# EAGLE board drill-rev-1_panelized (EAGLE 6.5.0)
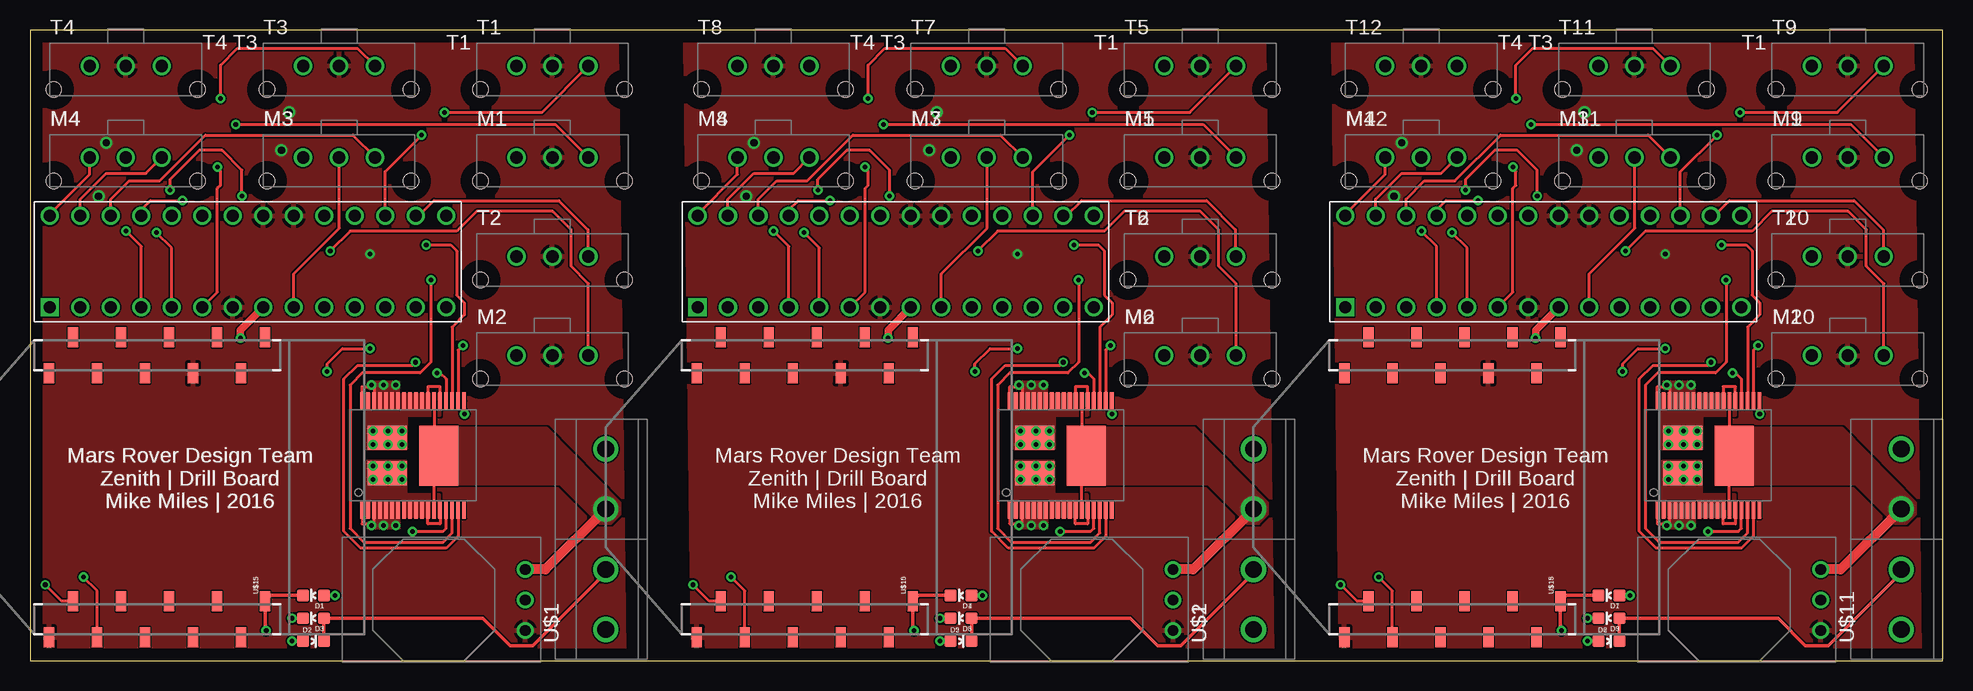
[diagram p0: board, top side]
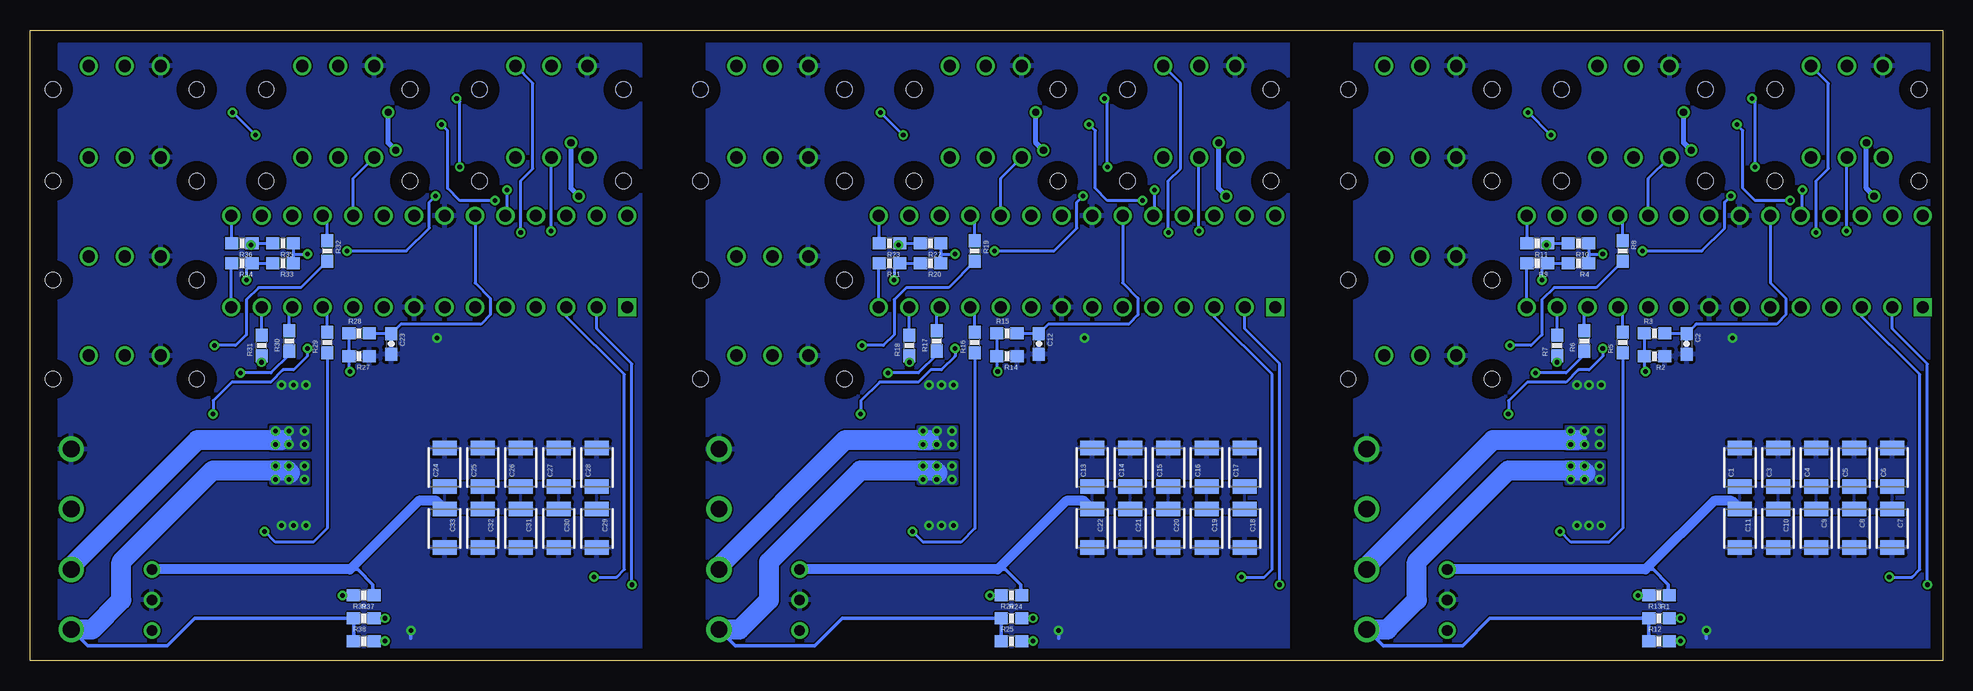
[diagram p1: board, bottom side, seen from below]

Size 159.38 x 52.58 mm. Coordinates in mm from the lower left corner, seen from the top.
Outline: 0,0 159.38,0 159.38,52.58 0,52.58 0,0
Copper layers (1*16): Top 0.035mm / dielectric 1.5mm / Bottom 0.035mm
Design rules "default *": minimum track width 6mil, minimum drill 10mil, track to track 5mil, track to pad 5mil, pad to pad 5mil, via to via 5mil, smd to smd 5mil, copper to edge 40mil, drill to drill 8mil, minimum pad ring 10mil, minimum via ring 8mil, stop-mask expansion 4mil, vias tented up to drill 0mil, thermal gap 10mil

## Footprints (pad centres in the part's own frame; a part is rotated, then mirrored left to right if it is on the bottom)
1210 = smd 1.2 x 2: 1 -1.6,0; 2 1.6,0
0603-CAP = smd 1.1 x 1: 1 -0.85,0; 2 0.85,0
LED-0603 = smd 1 x 1: A 0,-0.877; C 0,0.877
MOLEX0436500328 = drill 1.016: P$1 9.322,2.464; P$2 6.325,2.464; P$3 3.327,2.464 | hole 1.27: 0.33,0.508; 12.319,0.508
0603-RES = smd 1.1 x 1: 1 -0.85,0; 2 0.85,0
OKI-78SR_HORIZ = drill 0.889: 1 0,0; 2 -2.54,0; 3 -5.08,0
TE_2POS-5MM_SCREW_TERM = drill 1.4: P$1 2.5,3.45; P$2 7.5,3.45
POWERSSO-36_TP = smd 0.322 x 1.45: P$1 1,-0.75; P$2 1.5,-0.75; P$3 2,-0.75; P$4 2.5,-0.75; P$5 3,-0.75; P$6 3.5,-0.75; P$7 4,-0.75; P$8 4.5,-0.75; P$9 5,-0.75; P$10 5.5,-0.75; P$11 6,-0.75; P$12 6.5,-0.75; P$13 7,-0.75; P$14 7.5,-0.75; P$15 8,-0.75; P$16 8.5,-0.75; P$17 9,-0.75; P$18 9.5,-0.75; P$19 9.5,8.35; P$20 9,8.35; P$21 8.5,8.35; P$22 8,8.35; P$23 7.5,8.35; P$24 7,8.35; P$25 6.5,8.35; P$26 6,8.35; P$27 5.5,8.35; P$28 5,8.35; P$29 4.5,8.35; P$30 4,8.35; P$31 3.5,8.35; P$32 3,8.35; P$33 2.5,8.35; P$34 2,8.35; P$35 1.5,8.35; P$36 1,8.35 | smd 3.25 x 5: SLUG1 7.391,3.785 | smd 3.25 x 2: SLUG2 3.099,2.311; SLUG3 3.099,5.283
DIP_SKT_ATMEGA = drill 1 square: P$1 0,0 | drill 1: P$2 0,-2.54; P$3 0,-5.08; P$4 0,-7.62; P$5 0,-10.16; P$6 0,-12.7; P$7 0,-15.24; P$8 0,-17.78; P$9 0,-20.32; P$10 0,-22.86; P$11 0,-25.4; P$12 0,-27.94; P$13 0,-30.48; P$14 0,-33.02; P$15 7.62,-33.02; P$16 7.62,-30.48; P$17 7.62,-27.94; P$18 7.62,-25.4; P$19 7.62,-22.86; P$20 7.62,-20.32; P$21 7.62,-17.78; P$22 7.62,-15.24; P$23 7.62,-12.7; P$24 7.62,-10.16; P$25 7.62,-7.62; P$26 7.62,-5.08; P$27 7.62,-2.54; P$28 7.62,0
XBEE_802.15.4_SMD = smd 1.7 x 0.85: 1 -13.77,20; 2 -10.77,18; 3 -13.77,16; 4 -10.77,14; 5 -13.77,12; 6 -10.77,10; 7 -13.77,8; 8 -10.77,6; 9 -13.77,4; 10 -10.77,2; 11 11.23,2; 12 8.23,4; 13 11.23,6; 14 8.23,8; 15 11.23,10; 16 8.23,12; 17 11.23,14; 18 8.23,16; 19 11.23,18; 20 8.23,20

## Placement (x,y rotation side)
C1  47uf  [1210]  16.89,16.13 90 bottom
C2  33nF  [0603-CAP]  21.34,26.42 270 bottom
C3  47uf  [1210]  13.72,16.13 90 bottom
C4  47uf  [1210]  10.54,16.13 90 bottom
C5  47uf  [1210]  7.37,16.13 90 bottom
C6  47uf  [1210]  4.19,16.13 90 bottom
C7  47uf  [1210]  4.19,11.05 270 bottom
C8  47uf  [1210]  7.37,11.05 270 bottom
C9  47uf  [1210]  10.54,11.05 270 bottom
C10  47uf  [1210]  13.72,11.05 270 bottom
C11  47uf  [1210]  16.89,11.05 270 bottom
C12  33nF  [0603-CAP]  75.31,26.42 270 bottom
C13  47uf  [1210]  70.87,16.13 90 bottom
C14  47uf  [1210]  67.69,16.13 90 bottom
C15  47uf  [1210]  64.52,16.13 90 bottom
C16  47uf  [1210]  61.34,16.13 90 bottom
C17  47uf  [1210]  58.17,16.13 90 bottom
C18  47uf  [1210]  58.17,11.05 270 bottom
C19  47uf  [1210]  61.34,11.05 270 bottom
C20  47uf  [1210]  64.52,11.05 270 bottom
C21  47uf  [1210]  67.69,11.05 270 bottom
C22  47uf  [1210]  70.87,11.05 270 bottom
C23  33nF  [0603-CAP]  129.29,26.42 270 bottom
C24  47uf  [1210]  124.84,16.13 90 bottom
C25  47uf  [1210]  121.67,16.13 90 bottom
C26  47uf  [1210]  118.49,16.13 90 bottom
C27  47uf  [1210]  115.32,16.13 90 bottom
C28  47uf  [1210]  112.14,16.13 90 bottom
C29  47uf  [1210]  112.14,11.05 270 bottom
C30  47uf  [1210]  115.32,11.05 270 bottom
C31  47uf  [1210]  118.49,11.05 270 bottom
C32  47uf  [1210]  121.67,11.05 270 bottom
C33  47uf  [1210]  124.84,11.05 270 bottom
D1  red  [LED-0603]  23.62,5.46 90 top
D2  red  [LED-0603]  23.62,1.65 270 top
D3  green  [LED-0603]  23.62,3.56 90 top
D4  red  [LED-0603]  77.6,5.46 90 top
D5  red  [LED-0603]  77.6,1.65 270 top
D6  green  [LED-0603]  77.6,3.56 90 top
D7  red  [LED-0603]  131.57,5.46 90 top
D8  red  [LED-0603]  131.57,1.65 270 top
D9  green  [LED-0603]  131.57,3.56 90 top
M1  M03VERT  [MOLEX0436500328]  37.21,39.5 0 top
M2  M03VERT  [MOLEX0436500328]  37.21,22.99 0 top
M3  M03VERT  [MOLEX0436500328]  19.43,39.5 0 top
M4  M03VERT  [MOLEX0436500328]  1.65,39.5 0 top
M5  M03VERT  [MOLEX0436500328]  91.19,39.5 0 top
M6  M03VERT  [MOLEX0436500328]  91.19,22.99 0 top
M7  M03VERT  [MOLEX0436500328]  73.41,39.5 0 top
M8  M03VERT  [MOLEX0436500328]  55.63,39.5 0 top
M9  M03VERT  [MOLEX0436500328]  145.16,39.5 0 top
M10  M03VERT  [MOLEX0436500328]  145.16,22.99 0 top
M11  M03VERT  [MOLEX0436500328]  127.38,39.5 0 top
M12  M03VERT  [MOLEX0436500328]  109.6,39.5 0 top
R1  1K  [0603-RES]  23.62,5.46 180 bottom
R2  1.5K  [0603-RES]  24,25.4 180 bottom
R3  10K  [0603-RES]  24,27.3 0 bottom
R4  3K3  [0603-RES]  30.35,33.15 180 bottom
R5  1K  [0603-RES]  26.67,26.54 90 bottom
R6  1K  [0603-RES]  29.84,26.67 90 bottom
R7  1K  [0603-RES]  32.13,26.29 90 bottom
R8  10k  [0603-RES]  26.67,34.16 270 bottom
R9  1K  [0603-RES]  33.78,33.15 180 bottom
R10  3K3  [0603-RES]  30.35,34.8 180 bottom
R11  1K  [0603-RES]  33.78,34.8 180 bottom
R12  1K  [0603-RES]  23.62,1.65 0 bottom
R13  1K  [0603-RES]  23.62,3.56 0 bottom
R14  1.5K  [0603-RES]  77.98,25.4 180 bottom
R15  10K  [0603-RES]  77.98,27.3 0 bottom
R16  1K  [0603-RES]  80.64,26.54 90 bottom
R17  1K  [0603-RES]  83.82,26.67 90 bottom
R18  1K  [0603-RES]  86.11,26.29 90 bottom
R19  10k  [0603-RES]  80.64,34.16 270 bottom
R20  3K3  [0603-RES]  84.33,33.15 180 bottom
R21  1K  [0603-RES]  87.76,33.15 180 bottom
R22  3K3  [0603-RES]  84.33,34.8 180 bottom
R23  1K  [0603-RES]  87.76,34.8 180 bottom
R24  1K  [0603-RES]  77.6,5.46 180 bottom
R25  1K  [0603-RES]  77.6,1.65 0 bottom
R26  1K  [0603-RES]  77.6,3.56 0 bottom
R27  1.5K  [0603-RES]  131.95,25.4 180 bottom
R28  10K  [0603-RES]  131.95,27.3 0 bottom
R29  1K  [0603-RES]  134.62,26.54 90 bottom
R30  1K  [0603-RES]  137.79,26.67 90 bottom
R31  1K  [0603-RES]  140.08,26.29 90 bottom
R32  10k  [0603-RES]  134.62,34.16 270 bottom
R33  3K3  [0603-RES]  138.3,33.15 180 bottom
R34  1K  [0603-RES]  141.73,33.15 180 bottom
R35  3K3  [0603-RES]  138.3,34.8 180 bottom
R36  1K  [0603-RES]  141.73,34.8 180 bottom
R37  1K  [0603-RES]  131.57,5.46 180 bottom
R38  1K  [0603-RES]  131.57,1.65 0 bottom
R39  1K  [0603-RES]  131.57,3.56 0 bottom
T1  M03VERT  [MOLEX0436500328]  37.21,47.12 0 top
T2  M03VERT  [MOLEX0436500328]  37.21,31.24 0 top
T3  M03VERT  [MOLEX0436500328]  19.43,47.12 0 top
T4  M03VERT  [MOLEX0436500328]  1.65,47.12 0 top
T5  M03VERT  [MOLEX0436500328]  91.19,47.12 0 top
T6  M03VERT  [MOLEX0436500328]  91.19,31.24 0 top
T7  M03VERT  [MOLEX0436500328]  73.41,47.12 0 top
T8  M03VERT  [MOLEX0436500328]  55.63,47.12 0 top
T9  M03VERT  [MOLEX0436500328]  145.16,47.12 0 top
T10  M03VERT  [MOLEX0436500328]  145.16,31.24 0 top
T11  M03VERT  [MOLEX0436500328]  127.38,47.12 0 top
T12  M03VERT  [MOLEX0436500328]  109.6,47.12 0 top
U$1  Q_OKI-78SR  [OKI-78SR_HORIZ]  41.27,7.62 90 top
U$2  Q_OKI-78SR  [OKI-78SR_HORIZ]  95.25,7.62 90 top
U$3  TE_2POS-5MM_SCREW_TERM  [TE_2POS-5MM_SCREW_TERM]  51.44,0.13 90 top
U$4  TE_2POS-5MM_SCREW_TERM  [TE_2POS-5MM_SCREW_TERM]  105.41,0.13 90 top
U$5  TE_2POS-5MM_SCREW_TERM  [TE_2POS-5MM_SCREW_TERM]  51.44,10.16 90 top
U$6  VNH5XXX_HBRIDGEVNH5050A  [POWERSSO-36_TP]  26.67,13.34 0 top
U$7  TE_2POS-5MM_SCREW_TERM  [TE_2POS-5MM_SCREW_TERM]  105.41,10.16 90 top
U$8  VNH5XXX_HBRIDGEVNH5050A  [POWERSSO-36_TP]  80.64,13.34 0 top
U$9  DIP_SKT_ATMEGA  [DIP_SKT_ATMEGA]  55.63,29.46 90 top
U$10  XBEE_802.15.4SMD  [XBEE_802.15.4_SMD]  75.56,15.75 90 top
U$11  Q_OKI-78SR  [OKI-78SR_HORIZ]  149.22,7.62 90 top
U$12  TE_2POS-5MM_SCREW_TERM  [TE_2POS-5MM_SCREW_TERM]  159.38,0.13 90 top
U$13  DIP_SKT_ATMEGA  [DIP_SKT_ATMEGA]  1.65,29.46 90 top
U$14  TE_2POS-5MM_SCREW_TERM  [TE_2POS-5MM_SCREW_TERM]  159.38,10.16 90 top
U$15  XBEE_802.15.4SMD  [XBEE_802.15.4_SMD]  21.59,15.75 90 top
U$16  VNH5XXX_HBRIDGEVNH5050A  [POWERSSO-36_TP]  134.62,13.34 0 top
U$17  DIP_SKT_ATMEGA  [DIP_SKT_ATMEGA]  109.6,29.46 90 top
U$18  XBEE_802.15.4SMD  [XBEE_802.15.4_SMD]  129.54,15.75 90 top

## Library data of the parts
C1-C33 = SparkFun-Passives
D1-D9 = SparkFun-LED
M1-M12 T1-T12 U$3-U$5 U$7 U$9 U$12-U$14 U$17 = MRDT-Connectors
R1-R39 = SparkFun-Resistors
U$1 U$2 U$11 = MRDT-2015-PowerBoard
U$6 U$8 U$16 = MRDT-PowerICs
U$10 U$15 U$18 = MRDT-RF

## Nets
+3V1: M5.P$2 M6.P$2 R20.1 R22.1 T5.P$2 T6.P$2 T7.P$2 T8.P$2 U$2.3 U$9.P$7 U$9.P$20 U$9.P$21 U$10.1 U$10.14
+3V2: M9.P$2 M10.P$2 R33.1 R35.1 T9.P$2 T10.P$2 T11.P$2 T12.P$2 U$11.3 U$17.P$7 U$17.P$20 U$17.P$21 U$18.1 U$18.14
+3V3: M1.P$2 M2.P$2 R4.1 R10.1 T1.P$2 T2.P$2 T3.P$2 T4.P$2 U$1.3 U$13.P$7 U$13.P$20 U$13.P$21 U$15.1 U$15.14
+12V: C1.1 C3.1 C4.1 C5.1 C6.1 C7.1 C8.1 C9.1 C10.1 C11.1 R1.1 U$1.1 U$5.P$1 U$6.P$13 U$6.P$24 U$6.SLUG1
+12V1: C13.1 C14.1 C15.1 C16.1 C17.1 C18.1 C19.1 C20.1 C21.1 C22.1 R24.1 U$2.1 U$7.P$1 U$8.P$13 U$8.P$24 U$8.SLUG1
+12V2: C24.1 C25.1 C26.1 C27.1 C28.1 C29.1 C30.1 C31.1 C32.1 C33.1 R37.1 U$11.1 U$14.P$1 U$16.P$13 U$16.P$24 U$16.SLUG1
CS: C2.1 R3.2 U$13.P$23
CS1: C12.1 R15.2 U$9.P$23
CS2: C23.1 R28.2 U$17.P$23
CS_DIS: R8.1 U$13.P$18
CS_DIS1: R19.1 U$9.P$18
CS_DIS2: R32.1 U$17.P$18
D1: M3.P$3 U$13.P$19
D2: M3.P$2 U$13.P$9
D3: M4.P$3 U$13.P$28
D4: M4.P$2 U$13.P$4
D5: M7.P$3 U$9.P$19
D6: M7.P$2 U$9.P$9
D7: M8.P$3 U$9.P$28
D8: M8.P$2 U$9.P$4
D9: M11.P$3 U$17.P$19
D10: M11.P$2 U$17.P$9
D11: M12.P$3 U$17.P$28
D12: M12.P$2 U$17.P$4
ENA: R9.2 U$13.P$14
ENA1: R21.2 U$9.P$14
ENA2: R34.2 U$17.P$14
ENB: R11.2 U$13.P$15
ENB1: R23.2 U$9.P$15
ENB2: R36.2 U$17.P$15
GND: C1.2 C2.2 C3.2 C4.2 C5.2 C6.2 C7.2 C8.2 C9.2 C10.2 C11.2 D1.C M1.P$3 M2.P$3 R2.1 T1.P$3 T2.P$3 T3.P$3 T4.P$3 U$1.2 U$5.P$2 U$6.P$1 U$6.P$3 U$6.P$4 U$6.P$5 U$6.P$6 U$6.P$7 U$6.P$30 U$6.P$31 U$6.P$32 U$6.P$33 U$6.P$34 U$6.P$36 U$13.P$8 U$13.P$22 U$15.10
GND1: C12.2 C13.2 C14.2 C15.2 C16.2 C17.2 C18.2 C19.2 C20.2 C21.2 C22.2 D4.C M5.P$3 M6.P$3 R14.1 T5.P$3 T6.P$3 T7.P$3 T8.P$3 U$2.2 U$7.P$2 U$8.P$1 U$8.P$3 U$8.P$4 U$8.P$5 U$8.P$6 U$8.P$7 U$8.P$30 U$8.P$31 U$8.P$32 U$8.P$33 U$8.P$34 U$8.P$36 U$9.P$8 U$9.P$22 U$10.10
GND2: C23.2 C24.2 C25.2 C26.2 C27.2 C28.2 C29.2 C30.2 C31.2 C32.2 C33.2 D7.C M9.P$3 M10.P$3 R27.1 T9.P$3 T10.P$3 T11.P$3 T12.P$3 U$11.2 U$14.P$2 U$16.P$1 U$16.P$3 U$16.P$4 U$16.P$5 U$16.P$6 U$16.P$7 U$16.P$30 U$16.P$31 U$16.P$32 U$16.P$33 U$16.P$34 U$16.P$36 U$17.P$8 U$17.P$22 U$18.10
INA: R5.2 U$13.P$11
INA1: R16.2 U$9.P$11
INA2: R29.2 U$17.P$11
INB: R6.2 U$13.P$12
INB1: R17.2 U$9.P$12
INB2: R30.2 U$17.P$12
MOIST_1: M1.P$1 U$13.P$25
MOIST_2: M2.P$1 U$13.P$24
MOIST_3: M3.P$1 U$13.P$26
MOIST_4: M4.P$1 U$13.P$27
MOIST_5: M5.P$1 U$9.P$25
MOIST_6: M6.P$1 U$9.P$24
MOIST_7: M7.P$1 U$9.P$26
MOIST_8: M8.P$1 U$9.P$27
MOIST_9: M9.P$1 U$17.P$25
MOIST_10: M10.P$1 U$17.P$24
MOIST_11: M11.P$1 U$17.P$26
MOIST_12: M12.P$1 U$17.P$27
N$1: R20.2 R21.1 U$8.P$16
N$2: R4.2 R9.1 U$6.P$16
N$3: R2.2 R3.1 U$6.P$19
N$4: D1.A R1.2
N$5: D2.A R12.2
N$6: R22.2 R23.1 U$8.P$21
N$7: R10.2 R11.1 U$6.P$21
N$8: R5.1 U$6.P$15
N$9: R6.1 U$6.P$22
N$10: R7.1 U$6.P$17
N$11: R8.2 U$6.P$20
N$12: D3.C R13.2
N$13: R14.2 R15.1 U$8.P$19
N$14: R16.1 U$8.P$15
N$15: R17.1 U$8.P$22
N$16: R18.1 U$8.P$17
N$17: R19.2 U$8.P$20
N$18: D4.A R24.2
N$19: D5.A R25.2
N$20: D6.C R26.2
N$21: R33.2 R34.1 U$16.P$16
N$22: R35.2 R36.1 U$16.P$21
N$23: R27.2 R28.1 U$16.P$19
N$24: R29.1 U$16.P$15
N$25: R30.1 U$16.P$22
N$26: R31.1 U$16.P$17
N$27: R32.2 U$16.P$20
N$28: D7.A R37.2
N$29: D8.A R38.2
N$30: D9.C R39.2
OUTA: R12.1 R13.1 U$3.P$1 U$6.P$2 U$6.P$8 U$6.P$9 U$6.P$10 U$6.P$11 U$6.P$12 U$6.P$14 U$6.SLUG2
OUTA1: R25.1 R26.1 U$4.P$1 U$8.P$2 U$8.P$8 U$8.P$9 U$8.P$10 U$8.P$11 U$8.P$12 U$8.P$14 U$8.SLUG2
OUTA2: R38.1 R39.1 U$12.P$1 U$16.P$2 U$16.P$8 U$16.P$9 U$16.P$10 U$16.P$11 U$16.P$12 U$16.P$14 U$16.SLUG2
OUTB: D2.C D3.A U$3.P$2 U$6.P$23 U$6.P$25 U$6.P$26 U$6.P$27 U$6.P$28 U$6.P$29 U$6.P$35 U$6.SLUG3
OUTB1: D5.C D6.A U$4.P$2 U$8.P$23 U$8.P$25 U$8.P$26 U$8.P$27 U$8.P$28 U$8.P$29 U$8.P$35 U$8.SLUG3
OUTB2: D8.C D9.A U$12.P$2 U$16.P$23 U$16.P$25 U$16.P$26 U$16.P$27 U$16.P$28 U$16.P$29 U$16.P$35 U$16.SLUG3
PWM: R7.2 U$13.P$13
PWM1: R18.2 U$9.P$13
PWM2: R31.2 U$17.P$13
TEMP_1: T1.P$1 U$13.P$17
TEMP_2: T2.P$1 U$13.P$16
TEMP_3: T3.P$1 U$13.P$6
TEMP_4: T4.P$1 U$13.P$5
TEMP_5: T5.P$1 U$9.P$17
TEMP_6: T6.P$1 U$9.P$16
TEMP_7: T7.P$1 U$9.P$6
TEMP_8: T8.P$1 U$9.P$5
TEMP_9: T9.P$1 U$17.P$17
TEMP_10: T10.P$1 U$17.P$16
TEMP_11: T11.P$1 U$17.P$6
TEMP_12: T12.P$1 U$17.P$5
XB_DIN: U$13.P$3 U$15.3
XB_DIN1: U$9.P$3 U$10.3
XB_DIN2: U$17.P$3 U$18.3
XB_DOUT: U$13.P$2 U$15.2
XB_DOUT1: U$9.P$2 U$10.2
XB_DOUT2: U$17.P$2 U$18.2

## Tracks (layer width: path | path; a pad name or v marks a point on that pad's centre or on a via)
+3V1  (via drill 0.38, 0.6)
  Bottom 0.254: R22.1 R20.1 83.48,33.87 83.44,33.91 v82.3,33.91
  Bottom 0.406: v59.69,38.73 60.33,39.37 v60.33,43.18 | v74.93,42.55 75.56,43.18 v75.56,45.72
  pour Top (rank 6): 54.61,51.44 55.24,0.64 103.5,0.64 102.87,51.44
+3V2  (via drill 0.38, 0.6)
  Bottom 0.254: R35.1 R33.1 137.45,33.87 137.41,33.91 v136.27,33.91
  Bottom 0.406: v113.67,38.73 114.3,39.37 v114.3,43.18 | v128.91,42.55 129.54,43.18 v129.54,45.72
  pour Top (rank 6): 108.58,51.44 109.22,0.64 157.48,0.64 156.84,51.44
+3V3  (via drill 0.38, 0.6)
  Bottom 0.254: R10.1 R4.1 29.5,33.87 29.46,33.91 v28.32,33.91
  Bottom 0.406: v5.71,38.73 6.35,39.37 v6.35,43.18 | v20.95,42.55 21.59,43.18 v21.59,45.72
  pour Top (rank 6): 0.64,51.44 1.27,0.64 49.53,0.64 48.9,51.44
+12V
  Top 0.254: U$6.P$24 33.67,19.07 33.66,19.05 | U$6.P$13 33.67,15.22 | 33.67,15.22 33.66,15.24 | 33.67,15.22 33.67,16.73 U$6.SLUG1
  Top 0.813: U$5.P$1 42.95,7.62 U$1.1
  Bottom 0.305: 24.77,7.62 24.13,7.62 22.86,6.35 22.86,5.55 R1.1
  Bottom 0.813: C11.1 17.58,13.34 19.05,13.34 24.77,7.62 U$1.1
  pour Bottom: 3.56,12.32 17.53,12.32 17.53,14.86 3.56,14.86
  pour Top (no thermals): 33.66,19.43 43.05,19.43 49.15,13.21 49.15,12.19 48.39,11.43 47.5,11.43 44.2,14.73 35.31,14.73 33.66,16.38
+12V1
  Top 0.254: U$8.P$24 87.64,19.07 87.63,19.05 | U$8.P$13 87.64,15.22 | 87.64,15.22 87.63,15.24 | 87.64,15.22 87.64,16.73 U$8.SLUG1
  Top 0.813: U$7.P$1 96.92,7.62 U$2.1
  Bottom 0.305: 78.74,7.62 78.11,7.62 76.83,6.35 76.83,5.55 R24.1
  Bottom 0.813: C22.1 71.55,13.34 73.03,13.34 78.74,7.62 U$2.1
  pour Bottom: 57.53,12.32 71.5,12.32 71.5,14.86 57.53,14.86
  pour Top (no thermals): 87.63,19.43 97.03,19.43 103.12,13.21 103.12,12.19 102.36,11.43 101.47,11.43 98.17,14.73 89.28,14.73 87.63,16.38
+12V2
  Top 0.254: U$16.P$24 141.62,19.07 141.6,19.05 | U$16.P$13 141.62,15.22 | 141.62,15.22 141.6,15.24 | 141.62,15.22 141.62,16.73 U$16.SLUG1
  Top 0.813: U$14.P$1 150.9,7.62 U$11.1
  Bottom 0.305: 132.72,7.62 132.08,7.62 130.81,6.35 130.81,5.55 R37.1
  Bottom 0.813: C33.1 125.53,13.34 127,13.34 132.72,7.62 U$11.1
  pour Bottom: 111.51,12.32 125.48,12.32 125.48,14.86 111.51,14.86
  pour Top (no thermals): 141.6,19.43 151,19.43 157.1,13.21 157.1,12.19 156.34,11.43 155.45,11.43 152.15,14.73 143.26,14.73 141.6,16.38
CS
  Bottom 0.254: U$13.P$23 14.35,31.5 13.08,30.23 13.08,28.83 13.84,28.07 20.54,28.07 C2.1 23.11,27.27 R3.2
CS1
  Bottom 0.254: U$9.P$23 68.33,31.5 67.06,30.23 67.06,28.83 67.82,28.07 74.51,28.07 C12.1 77.09,27.27 R15.2
CS2
  Bottom 0.254: U$17.P$23 122.3,31.5 121.03,30.23 121.03,28.83 121.79,28.07 128.49,28.07 C23.1 131.06,27.27 R28.2
CS_DIS
  Bottom 0.254: R8.1 26.67,36.7 U$13.P$18
CS_DIS1
  Bottom 0.254: R19.1 80.64,36.7 U$9.P$18
CS_DIS2
  Bottom 0.254: R32.1 134.62,36.7 U$17.P$18
D1
  Bottom 0.254: U$13.P$19 24.51,40.21 M3.P$3
D2
  Top 0.254: U$13.P$9 21.97,32.26 25.78,36.07 25.78,41.94 M3.P$2
D3
  Top 0.254: M4.P$3 4.98,40.54 1.65,37.21 U$13.P$28
D4  (via drill 0.38)
  Top 0.254: U$13.P$4 9.27,34.54 v8,35.81
  Bottom 0.254: v8,35.81 8,41.94 M4.P$2
D5
  Bottom 0.254: U$9.P$19 78.49,40.21 M7.P$3
D6
  Top 0.254: U$9.P$9 75.95,32.26 79.76,36.07 79.76,41.94 M7.P$2
D7
  Top 0.254: M8.P$3 58.95,40.54 55.63,37.21 U$9.P$28
D8  (via drill 0.38)
  Top 0.254: U$9.P$4 63.25,34.54 v61.98,35.81
  Bottom 0.254: v61.98,35.81 61.98,41.94 M8.P$2
D9
  Bottom 0.254: U$17.P$19 132.46,40.21 M11.P$3
D10
  Top 0.254: U$17.P$9 129.92,32.26 133.73,36.07 133.73,41.94 M11.P$2
D11
  Top 0.254: M12.P$3 112.93,40.54 109.6,37.21 U$17.P$28
D12  (via drill 0.38)
  Top 0.254: U$17.P$4 117.22,34.54 v115.95,35.81
  Bottom 0.254: v115.95,35.81 115.95,41.94 M12.P$2
ENA
  Bottom 0.254: U$13.P$14 34.67,33.11 R9.2
ENA1
  Bottom 0.254: U$9.P$14 88.65,33.11 R21.2
ENA2
  Bottom 0.254: U$17.P$14 142.62,33.11 R34.2
ENB
  Bottom 0.254: U$13.P$15 34.67,34.84 R11.2
ENB1
  Bottom 0.254: U$9.P$15 88.65,34.84 R23.2
ENB2
  Bottom 0.254: U$17.P$15 142.62,34.84 R36.2
GND  (via drill 0.38)
  Top 0.254: U$6.P$1 27.67,11.45 27.69,11.43 28.7,11.43 28.7,12.55 U$6.P$3 | U$6.P$36 27.67,22.84 27.69,22.86 28.7,22.86 28.7,21.72 U$6.P$34
  Top 0.305: D1.C 20.07,5.46 U$15.10 19.59,2.63 v19.68,2.54
  Top 0.61: v17.53,26.92 17.53,27.56 U$13.P$8
  Bottom 0.305: v19.68,2.54 19.68,1.91
  other vias: 28.45,11.3 29.46,11.3 30.48,11.3 28.45,22.99 29.46,22.99 30.48,22.99
  pour Bottom (rank 6): 0.64,51.44 0.64,0.64 48.9,0.64 48.9,51.44
  pour Top (no thermals): 30.73,13.21 30.73,11.05 28.19,11.05 28.19,11.56 28.7,11.56 28.7,13.21
  pour Top (no thermals): 30.73,22.23 30.73,21.08 28.7,21.08 28.7,22.23
  pour Top (no thermals): 30.73,21.08 30.73,23.24 28.19,23.24 28.19,22.73 28.7,22.73 28.7,21.08
GND1  (via drill 0.38)
  Top 0.254: U$8.P$1 81.64,11.45 81.66,11.43 82.68,11.43 82.68,12.55 U$8.P$3 | U$8.P$36 81.64,22.84 81.66,22.86 82.68,22.86 82.68,21.72 U$8.P$34
  Top 0.305: D4.C 74.05,5.46 U$10.10 73.56,2.63 v73.66,2.54
  Top 0.61: v71.5,26.92 71.5,27.56 U$9.P$8
  Bottom 0.305: v73.66,2.54 73.66,1.91
  other vias: 82.42,11.3 83.44,11.3 84.45,11.3 82.42,22.99 83.44,22.99 84.45,22.99
  pour Bottom (rank 6): 54.61,51.44 54.61,0.64 102.87,0.64 102.87,51.44
  pour Top (no thermals): 84.71,13.21 84.71,11.05 82.17,11.05 82.17,11.56 82.68,11.56 82.68,13.21
  pour Top (no thermals): 84.71,22.23 84.71,21.08 82.68,21.08 82.68,22.23
  pour Top (no thermals): 84.71,21.08 84.71,23.24 82.17,23.24 82.17,22.73 82.68,22.73 82.68,21.08
GND2  (via drill 0.38)
  Top 0.254: U$16.P$1 135.62,11.45 135.64,11.43 136.65,11.43 136.65,12.55 U$16.P$3 | U$16.P$36 135.62,22.84 135.64,22.86 136.65,22.86 136.65,21.72 U$16.P$34
  Top 0.305: D7.C 128.02,5.46 U$18.10 127.54,2.63 v127.64,2.54
  Top 0.61: v125.48,26.92 125.48,27.56 U$17.P$8
  Bottom 0.305: v127.64,2.54 127.64,1.91
  other vias: 136.4,11.3 137.41,11.3 138.43,11.3 136.4,22.99 137.41,22.99 138.43,22.99
  pour Bottom (rank 6): 108.58,51.44 108.58,0.64 156.84,0.64 156.84,51.44
  pour Top (no thermals): 138.68,13.21 138.68,11.05 136.14,11.05 136.14,11.56 136.65,11.56 136.65,13.21
  pour Top (no thermals): 138.68,22.23 138.68,21.08 136.65,21.08 136.65,22.23
  pour Top (no thermals): 138.68,21.08 138.68,23.24 136.14,23.24 136.14,22.73 136.65,22.73 136.65,21.08
INA
  Bottom 0.254: R5.2 26.67,29.08 U$13.P$11
INA1
  Bottom 0.254: R16.2 80.64,29.08 U$9.P$11
INA2
  Bottom 0.254: R29.2 134.62,29.08 U$17.P$11
INB
  Bottom 0.254: R6.2 29.84,29.21 U$13.P$12
INB1
  Bottom 0.254: R17.2 83.82,29.21 U$9.P$12
INB2
  Bottom 0.254: R30.2 137.79,29.21 U$17.P$12
MOIST_1  (via drill 0.38)
  Top 0.254: U$13.P$25 9.27,37.59 10.03,38.35 v12.7,38.35 | v17.14,44.7 43.79,44.7 M1.P$1
  Bottom 0.254: v12.7,38.35 15.62,38.35 16.64,39.37 16.64,44.2 v17.14,44.7
MOIST_2  (via drill 0.38)
  Top 0.254: M2.P$1 46.53,31.45 45.09,32.89 45.09,35.94 43.56,37.47 37.21,37.47 35.56,35.81 26.67,35.81 v25.02,34.16 | v17.65,38.73 17.65,40.89 16,42.55 14.1,42.55 11.68,40.13 v11.68,39.24
  Bottom 0.254: v25.02,34.16 20.07,34.16 18.16,36.07 18.16,38.23 v17.65,38.73 | U$13.P$24 11.68,37.21 v11.68,39.24
MOIST_3
  Top 0.254: U$13.P$26 6.73,38.48 8.26,40.01 10.79,40.01 14.61,43.81 26.9,43.81 M3.P$1
MOIST_4
  Top 0.254: U$13.P$27 4.19,38.48 6.35,40.64 9.65,40.64 M4.P$1
MOIST_5  (via drill 0.38)
  Top 0.254: U$9.P$25 63.25,37.59 64.01,38.35 v66.67,38.35 | v71.12,44.7 97.77,44.7 M5.P$1
  Bottom 0.254: v66.67,38.35 69.6,38.35 70.61,39.37 70.61,44.2 v71.12,44.7
MOIST_6  (via drill 0.38)
  Top 0.254: M6.P$1 100.51,31.45 99.06,32.89 99.06,35.94 97.54,37.47 91.19,37.47 89.53,35.81 80.64,35.81 v78.99,34.16 | v71.63,38.73 71.63,40.89 69.98,42.55 68.07,42.55 65.66,40.13 v65.66,39.24
  Bottom 0.254: v78.99,34.16 74.04,34.16 72.14,36.07 72.14,38.23 v71.63,38.73 | U$9.P$24 65.66,37.21 v65.66,39.24
MOIST_7
  Top 0.254: U$9.P$26 60.71,38.48 62.23,40.01 64.77,40.01 68.58,43.81 80.87,43.81 M7.P$1
MOIST_8
  Top 0.254: U$9.P$27 58.17,38.48 60.33,40.64 63.63,40.64 M8.P$1
MOIST_9  (via drill 0.38)
  Top 0.254: U$17.P$25 117.22,37.59 117.98,38.35 v120.65,38.35 | v125.09,44.7 151.74,44.7 M9.P$1
  Bottom 0.254: v120.65,38.35 123.57,38.35 124.59,39.37 124.59,44.2 v125.09,44.7
MOIST_10  (via drill 0.38)
  Top 0.254: M10.P$1 154.48,31.45 153.03,32.89 153.03,35.94 151.51,37.47 145.16,37.47 143.51,35.81 134.62,35.81 v132.97,34.16 | v125.6,38.73 125.6,40.89 123.95,42.55 122.05,42.55 119.63,40.13 v119.63,39.24
  Bottom 0.254: v132.97,34.16 128.02,34.16 126.11,36.07 126.11,38.23 v125.6,38.73 | U$17.P$24 119.63,37.21 v119.63,39.24
MOIST_11
  Top 0.254: U$17.P$26 114.68,38.48 116.2,40.01 118.75,40.01 122.56,43.81 134.85,43.81 M11.P$1
MOIST_12
  Top 0.254: U$17.P$27 112.14,38.48 114.3,40.64 117.6,40.64 M12.P$1
N$1  (via drill 0.38)
  Top 0.254: v87.38,31.75 87.38,24.89 86.49,24 81.66,24 80.64,22.99 80.64,11.05 81.79,9.91 88.39,9.91 89.15,10.67 89.15,12.58 U$8.P$16
  Bottom 0.254: R20.2 R21.1 87.38,32.68 v87.38,31.75
N$2  (via drill 0.38)
  Top 0.254: v33.4,31.75 33.4,24.89 32.51,24 27.69,24 26.67,22.99 26.67,11.05 27.81,9.91 34.42,9.91 35.18,10.67 35.18,12.58 U$6.P$16
  Bottom 0.254: R4.2 R9.1 33.4,32.68 v33.4,31.75
N$3  (via drill 0.38)
  Top 0.254: v24.77,24.13 24.77,24.77 26.04,26.04 v28.32,26.04 | v36.2,20.57 36.2,21.66 U$6.P$19
  Bottom 0.254: R3.1 R2.2 24.85,24.22 v24.77,24.13 | v28.32,26.04 28.32,25.4 29.46,24.26 30.35,24.26 31.37,23.24 34.61,23.24 U$6.P$19 36.17,20.6 v36.2,20.57
N$4  (via drill 0.38)
  Top 0.254: D1.A v25.4,5.46
  Bottom 0.254: v25.4,5.46 R1.2
N$5  (via drill 0.38)
  Top 0.254: v21.84,1.65 D2.A
  Bottom 0.254: R12.2 v21.84,1.65
N$6  (via drill 0.38)
  Top 0.254: U$8.P$21 89.15,21.69 89.15,27.81 90.17,28.83 90.17,29.84 89.53,30.48 89.53,34.16 89.03,34.67 v87,34.67
  Bottom 0.254: R22.2 R23.1 87,34.71 v87,34.67
N$7  (via drill 0.38)
  Top 0.254: U$6.P$21 35.18,27.81 36.2,28.83 36.2,29.84 35.56,30.48 35.56,34.16 35.05,34.67 v33.02,34.67
  Bottom 0.254: R10.2 R11.1 33.02,34.71 v33.02,34.67
N$8  (via drill 0.38)
  Top 0.254: v31.88,10.79 34.42,10.79 34.67,11.05 U$6.P$15
  Bottom 0.254: R5.1 26.67,11.05 27.81,9.91 30.99,9.91 v31.88,10.79
N$9  (via drill 0.38)
  Top 0.254: v33.91,24 34.16,24 34.67,23.5 U$6.P$22
  Bottom 0.254: R6.1 29.84,25.53 31.37,24 v33.91,24
N$10  (via drill 0.38)
  Top 0.254: U$6.P$17 35.67,10.4 34.67,9.4 27.56,9.4 26.16,10.79 26.16,23.5 27.3,24.64 31.88,24.64 v32.13,24.89
  Bottom 0.254: v32.13,24.89 R7.1
N$11  (via drill 0.38)
  Top 0.254: v36.07,26.29 35.67,25.89 U$6.P$20
  Bottom 0.254: R8.2 28.87,31.11 32.38,31.11 33.4,30.1 33.4,27.18 34.29,26.29 v36.07,26.29
N$12  (via drill 0.38)
  Top 0.254: v21.84,3.56 D3.C
  Bottom 0.254: R13.2 v21.84,3.56
N$13  (via drill 0.38)
  Top 0.254: v78.74,24.13 78.74,24.77 80.01,26.04 v82.3,26.04 | v90.17,20.57 90.17,21.66 U$8.P$19
  Bottom 0.254: R15.1 R14.2 78.83,24.22 v78.74,24.13 | v82.3,26.04 82.3,25.4 83.44,24.26 84.33,24.26 85.34,23.24 88.59,23.24 U$8.P$19 90.14,20.6 v90.17,20.57
N$14  (via drill 0.38)
  Top 0.254: v85.85,10.79 88.39,10.79 88.65,11.05 U$8.P$15
  Bottom 0.254: R16.1 80.64,11.05 81.79,9.91 84.96,9.91 v85.85,10.79
N$15  (via drill 0.38)
  Top 0.254: v87.88,24 88.14,24 88.65,23.5 U$8.P$22
  Bottom 0.254: R17.1 83.82,25.53 85.34,24 v87.88,24
N$16  (via drill 0.38)
  Top 0.254: U$8.P$17 89.64,10.4 88.65,9.4 81.53,9.4 80.14,10.79 80.14,23.5 81.28,24.64 85.85,24.64 v86.11,24.89
  Bottom 0.254: v86.11,24.89 R18.1
N$17  (via drill 0.38)
  Top 0.254: v90.04,26.29 89.64,25.89 U$8.P$20
  Bottom 0.254: R19.2 82.84,31.11 86.36,31.11 87.38,30.1 87.38,27.18 88.27,26.29 v90.04,26.29
N$18  (via drill 0.38)
  Top 0.254: D4.A v79.38,5.46
  Bottom 0.254: v79.38,5.46 R24.2
N$19  (via drill 0.38)
  Top 0.254: v75.82,1.65 D5.A
  Bottom 0.254: R25.2 v75.82,1.65
N$20  (via drill 0.38)
  Top 0.254: v75.82,3.56 D6.C
  Bottom 0.254: R26.2 v75.82,3.56
N$21  (via drill 0.38)
  Top 0.254: v141.35,31.75 141.35,24.89 140.46,24 135.64,24 134.62,22.99 134.62,11.05 135.76,9.91 142.37,9.91 143.13,10.67 143.13,12.58 U$16.P$16
  Bottom 0.254: R33.2 R34.1 141.35,32.68 v141.35,31.75
N$22  (via drill 0.38)
  Top 0.254: U$16.P$21 143.13,27.81 144.15,28.83 144.15,29.84 143.51,30.48 143.51,34.16 143,34.67 v140.97,34.67
  Bottom 0.254: R35.2 R36.1 140.97,34.71 v140.97,34.67
N$23  (via drill 0.38)
  Top 0.254: v132.72,24.13 132.72,24.77 133.99,26.04 v136.27,26.04 | v144.15,20.57 144.15,21.66 U$16.P$19
  Bottom 0.254: R28.1 R27.2 132.8,24.22 v132.72,24.13 | v136.27,26.04 136.27,25.4 137.41,24.26 138.3,24.26 139.32,23.24 142.56,23.24 U$16.P$19 144.12,20.6 v144.15,20.57
N$24  (via drill 0.38)
  Top 0.254: v139.83,10.79 142.37,10.79 142.62,11.05 U$16.P$15
  Bottom 0.254: R29.1 134.62,11.05 135.76,9.91 138.94,9.91 v139.83,10.79
N$25  (via drill 0.38)
  Top 0.254: v141.86,24 142.11,24 142.62,23.5 U$16.P$22
  Bottom 0.254: R30.1 137.79,25.53 139.32,24 v141.86,24
N$26  (via drill 0.38)
  Top 0.254: U$16.P$17 143.62,10.4 142.62,9.4 135.51,9.4 134.11,10.79 134.11,23.5 135.25,24.64 139.83,24.64 v140.08,24.89
  Bottom 0.254: v140.08,24.89 R31.1
N$27  (via drill 0.38)
  Top 0.254: v144.02,26.29 143.62,25.89 U$16.P$20
  Bottom 0.254: R32.2 136.82,31.11 140.34,31.11 141.35,30.1 141.35,27.18 142.24,26.29 v144.02,26.29
N$28  (via drill 0.38)
  Top 0.254: D7.A v133.35,5.46
  Bottom 0.254: v133.35,5.46 R37.2
N$29  (via drill 0.38)
  Top 0.254: v129.79,1.65 D8.A
  Bottom 0.254: R38.2 v129.79,1.65
N$30  (via drill 0.38)
  Top 0.254: v129.79,3.56 D9.C
  Bottom 0.254: R39.2 v129.79,3.56
OUTA  (via drill 0.38)
  Top 0.254: U$6.P$14 34.17,11.44 34.16,11.43 33.15,11.43 33.15,12.56 U$6.P$12
  Bottom 0.305: R12.1 R13.1 37.72,3.56 40.01,1.27 46.63,1.27 U$3.P$1
  Bottom 1.676: U$3.P$1 46.27,2.63 43.81,5.08 43.81,8.26 36.2,15.88 30,15.88 U$6.SLUG2
  other vias: 30.99,16.26 30.99,15.11 29.84,15.11 29.84,16.26 28.57,16.26 28.57,15.11
  pour Top (rank 2, no thermals): 34.16,12.06 34.16,13.84 31.37,13.84 31.37,16.64 28.07,16.64 28.07,12.06
  pour Bottom: 28.19,16.64 28.19,14.73 31.37,14.73 31.37,16.64
OUTA1  (via drill 0.38)
  Top 0.254: U$8.P$14 88.14,11.44 88.14,11.43 87.12,11.43 87.12,12.56 U$8.P$12
  Bottom 0.305: R25.1 R26.1 91.69,3.56 93.98,1.27 100.6,1.27 U$4.P$1
  Bottom 1.676: U$4.P$1 100.24,2.63 97.79,5.08 97.79,8.26 90.17,15.88 83.97,15.88 U$8.SLUG2
  other vias: 84.96,16.26 84.96,15.11 83.82,15.11 83.82,16.26 82.55,16.26 82.55,15.11
  pour Top (rank 2, no thermals): 88.14,12.06 88.14,13.84 85.34,13.84 85.34,16.64 82.04,16.64 82.04,12.06
  pour Bottom: 82.17,16.64 82.17,14.73 85.34,14.73 85.34,16.64
OUTA2  (via drill 0.38)
  Top 0.254: U$16.P$14 142.12,11.44 142.11,11.43 141.1,11.43 141.1,12.56 U$16.P$12
  Bottom 0.305: R38.1 R39.1 145.67,3.56 147.96,1.27 154.58,1.27 U$12.P$1
  Bottom 1.676: U$12.P$1 154.22,2.63 151.76,5.08 151.76,8.26 144.15,15.88 137.95,15.88 U$16.SLUG2
  other vias: 138.94,16.26 138.94,15.11 137.79,15.11 137.79,16.26 136.53,16.26 136.53,15.11
  pour Top (rank 2, no thermals): 142.11,12.06 142.11,13.84 139.32,13.84 139.32,16.64 136.02,16.64 136.02,12.06
  pour Bottom: 136.14,16.64 136.14,14.73 139.32,14.73 139.32,16.64
OUTB  (via drill 0.38)
  Top 0.254: U$6.P$23 34.17,22.73 34.16,22.86 33.15,22.86 33.15,21.71 U$6.P$25
  Top 0.305: D2.C D3.A 37.72,3.56 40.01,1.27 41.91,1.27 47.98,7.34 U$3.P$2
  Bottom 1.676: U$3.P$2 47.98,7.89 37.47,18.41 30.48,18.41
  other vias: 30.99,19.18 30.99,18.03 29.84,18.03 29.84,19.18 28.57,19.18 28.57,18.03
  pour Top (no thermals): 34.16,22.23 34.16,20.45 31.37,20.45 31.37,17.65 28.07,17.65 28.07,22.23
  pour Bottom: 28.19,19.56 28.19,17.65 31.37,17.65 31.37,19.56
OUTB1  (via drill 0.38)
  Top 0.254: U$8.P$23 88.14,22.73 88.14,22.86 87.12,22.86 87.12,21.71 U$8.P$25
  Top 0.305: D5.C D6.A 91.69,3.56 93.98,1.27 95.89,1.27 101.96,7.34 U$4.P$2
  Bottom 1.676: U$4.P$2 101.96,7.89 91.44,18.41 84.45,18.41
  other vias: 84.96,19.18 84.96,18.03 83.82,18.03 83.82,19.18 82.55,19.18 82.55,18.03
  pour Top (no thermals): 88.14,22.23 88.14,20.45 85.34,20.45 85.34,17.65 82.04,17.65 82.04,22.23
  pour Bottom: 82.17,19.56 82.17,17.65 85.34,17.65 85.34,19.56
OUTB2  (via drill 0.38)
  Top 0.254: U$16.P$23 142.12,22.73 142.11,22.86 141.1,22.86 141.1,21.71 U$16.P$25
  Top 0.305: D8.C D9.A 145.67,3.56 147.96,1.27 149.86,1.27 155.94,7.34 U$12.P$2
  Bottom 1.676: U$12.P$2 155.94,7.89 145.41,18.41 138.43,18.41
  other vias: 138.94,19.18 138.94,18.03 137.79,18.03 137.79,19.18 136.53,19.18 136.53,18.03
  pour Top (no thermals): 142.11,22.23 142.11,20.45 139.32,20.45 139.32,17.65 136.02,17.65 136.02,22.23
  pour Bottom: 136.14,19.56 136.14,17.65 139.32,17.65 139.32,19.56
PWM
  Bottom 0.254: R7.2 U$13.P$13
PWM1
  Bottom 0.254: R18.2 U$9.P$13
PWM2
  Bottom 0.254: R31.2 U$17.P$13
TEMP_1  (via drill 0.38)
  Top 0.254: U$13.P$17 29.59,40.77 v32.64,43.81 | v34.54,45.72 42.67,45.72 T1.P$1
  Bottom 0.254: v32.64,43.81 v34.54,45.72
TEMP_2
  Top 0.254: U$13.P$16 32.38,37.08 33.66,38.35 44.07,38.35 46.48,35.94 46.48,33.76 T2.P$1
TEMP_3  (via drill 0.38)
  Top 0.254: U$13.P$6 15.62,30.73 15.62,39.37 15.88,39.62 15.88,40.77 v15.62,41.15 | v15.88,46.86 15.88,49.66 17.27,51.05 27.28,51.05 T3.P$1
  Bottom 0.254: v15.62,41.15 15.62,46.61 v15.88,46.86
TEMP_4  (via drill 0.38)
  Top 0.254: U$13.P$5 11.81,34.42 v10.54,35.69
  Bottom 0.254: v10.54,35.69 10.54,40.01 9.53,41.02 9.53,48.13 T4.P$1
TEMP_5  (via drill 0.38)
  Top 0.254: U$9.P$17 83.57,40.77 v86.61,43.81 | v88.52,45.72 96.65,45.72 T5.P$1
  Bottom 0.254: v86.61,43.81 v88.52,45.72
TEMP_6
  Top 0.254: U$9.P$16 86.36,37.08 87.63,38.35 98.04,38.35 100.46,35.94 100.46,33.76 T6.P$1
TEMP_7  (via drill 0.38)
  Top 0.254: U$9.P$6 69.6,30.73 69.6,39.37 69.85,39.62 69.85,40.77 v69.6,41.15 | v69.85,46.86 69.85,49.66 71.25,51.05 81.25,51.05 T7.P$1
  Bottom 0.254: v69.6,41.15 69.6,46.61 v69.85,46.86
TEMP_8  (via drill 0.38)
  Top 0.254: U$9.P$5 65.79,34.42 v64.52,35.69
  Bottom 0.254: v64.52,35.69 64.52,40.01 63.5,41.02 63.5,48.13 T8.P$1
TEMP_9  (via drill 0.38)
  Top 0.254: U$17.P$17 137.54,40.77 v140.59,43.81 | v142.49,45.72 150.62,45.72 T9.P$1
  Bottom 0.254: v140.59,43.81 v142.49,45.72
TEMP_10
  Top 0.254: U$17.P$16 140.34,37.08 141.6,38.35 152.02,38.35 154.43,35.94 154.43,33.76 T10.P$1
TEMP_11  (via drill 0.38)
  Top 0.254: U$17.P$6 123.57,30.73 123.57,39.37 123.83,39.62 123.83,40.77 v123.57,41.15 | v123.83,46.86 123.83,49.66 125.22,51.05 135.23,51.05 T11.P$1
  Bottom 0.254: v123.57,41.15 123.57,46.61 v123.83,46.86
TEMP_12  (via drill 0.38)
  Top 0.254: U$17.P$5 119.76,34.42 v118.49,35.69
  Bottom 0.254: v118.49,35.69 118.49,40.01 117.47,41.02 117.47,48.13 T12.P$1
XB_DIN  (via drill 0.38)
  Top 0.254: U$15.3 5.59,5.84 v4.45,6.99
  Bottom 0.254: v4.45,6.99 2.54,6.99 1.91,7.62 1.91,23.88 6.73,28.7 U$13.P$3
XB_DIN1  (via drill 0.38)
  Top 0.254: U$10.3 59.56,5.84 v58.42,6.99
  Bottom 0.254: v58.42,6.99 56.52,6.99 55.88,7.62 55.88,23.88 60.71,28.7 U$9.P$3
XB_DIN2  (via drill 0.38)
  Top 0.254: U$18.3 113.54,5.84 v112.39,6.99
  Bottom 0.254: v112.39,6.99 110.49,6.99 109.86,7.62 109.86,23.88 114.68,28.7 U$17.P$3
XB_DOUT  (via drill 0.38)
  Top 0.254: U$15.2 2.64,4.98 v1.27,6.35
  Bottom 0.254: v1.27,6.35 1.27,24.77 4.19,27.69 U$13.P$2
XB_DOUT1  (via drill 0.38)
  Top 0.254: U$10.2 56.62,4.98 v55.24,6.35
  Bottom 0.254: v55.24,6.35 55.24,24.77 58.17,27.69 U$9.P$2
XB_DOUT2  (via drill 0.38)
  Top 0.254: U$18.2 110.59,4.98 v109.22,6.35
  Bottom 0.254: v109.22,6.35 109.22,24.77 112.14,27.69 U$17.P$2

## Text on the board
tPlace: Mars Rover Design Team / Zenith | Drill Board / Mike Miles | 2016
_tNames: T4 | T3 | T1 | T4 | T3 | T1 | T4 | T3 | T1 | M4 | M3 | M1 | M4 | M3 | M1 | M4 | M3 | M1 | T2 | T2 | T2 | M2 | M2 | M2 | Mars Rover Design Team / Zenith | Drill Board / Mike Miles | 2016 | Mars Rover Design Team / Zenith | Drill Board / Mike Miles | 2016 | Mars Rover Design Team / Zenith | Drill Board / Mike Miles | 2016 | U$15 | U$15 | U$15 | D1 | D1 | D1 | D3 | D3 | D3 | D2 | U$1 | D2 | U$1 | D2 | U$1
_bNames: R8 | R8 | R8 | R10 | R11 | R10 | R11 | R10 | R11 | R4 | R9 | R4 | R9 | R4 | R9 | R3 | R3 | R3 | C2 | C2 | C2 | R5 | R6 | R5 | R6 | R5 | R6 | R2 | R7 | R2 | R7 | R2 | R7 | C6 | C5 | C4 | C3 | C1 | C6 | C5 | C4 | C3 | C1 | C6 | C5 | C4 | C3 | C1 | C7 | C8 | C9 | C10 | C11 | C7 | C8 | C9 | C10 | C11 | C7 | C8 | C9 | C10 | C11 | R1 | R1 | R1 | R13 | R13 | R13 | R12 | R12 | R12